# EAGLE board CM FT4232 with RS485 and ESP32 (EAGLE 9.6.2)
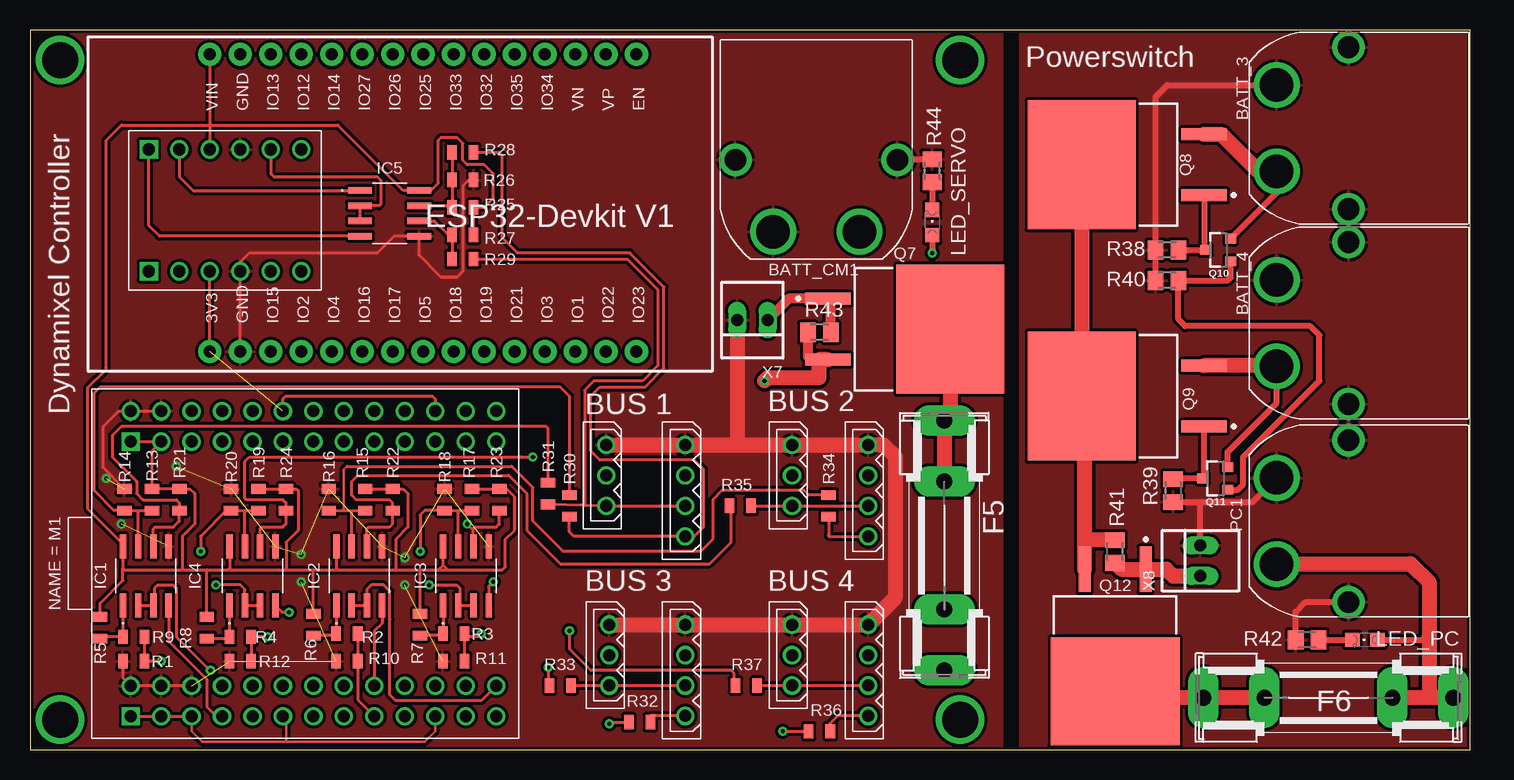
[diagram p0: board, top side]
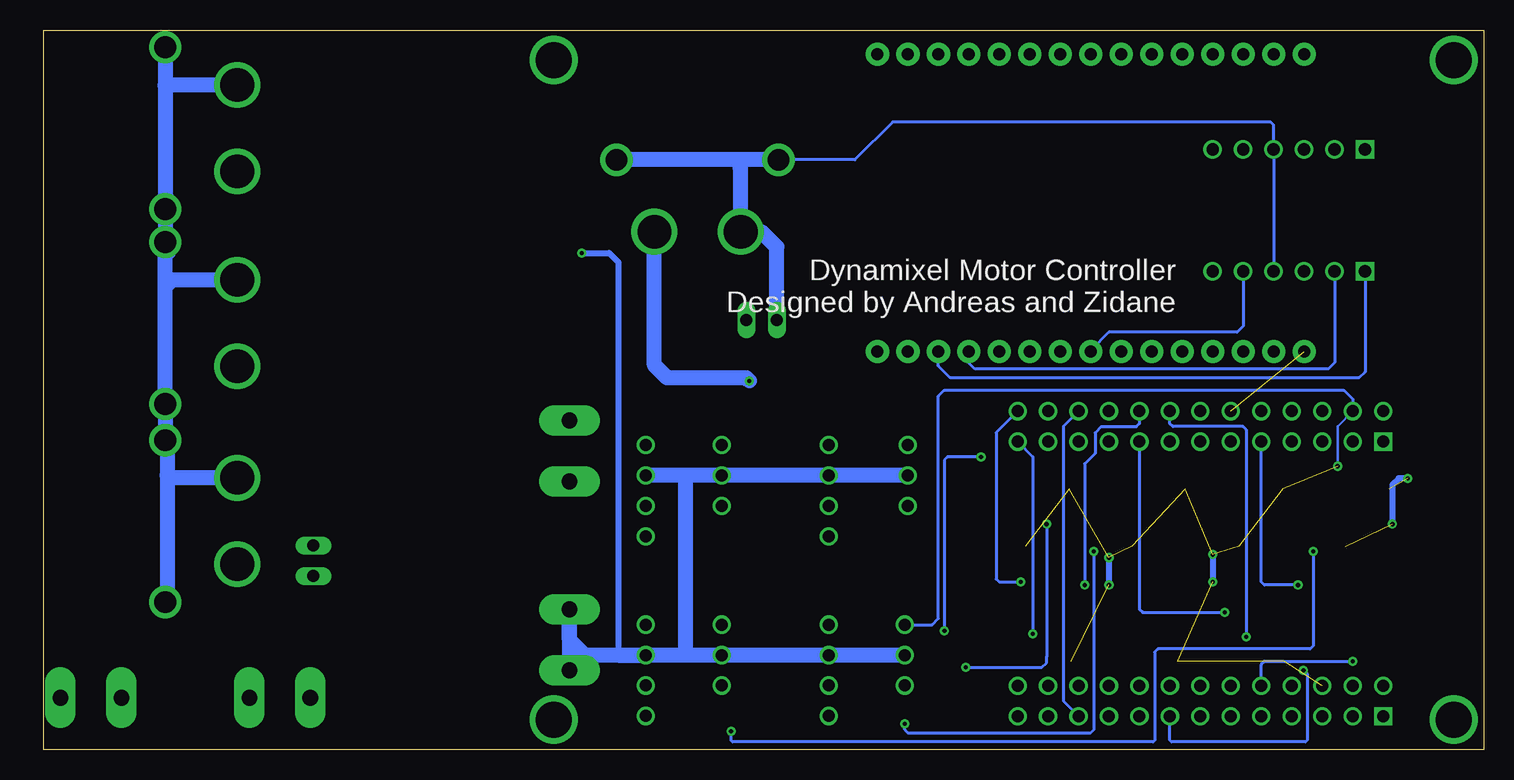
[diagram p1: board, bottom side, seen from below]

Size 120 x 60 mm. Coordinates in mm from the lower left corner, seen from the top.
Outline: 0,0 120,0 120,60 0,60 0,0
Copper layers (1*16): Top 0.035mm / dielectric 1.5mm / Bottom 0.035mm
Design rules "default *": minimum track width 6mil, minimum drill 0.35mm, track to track 10mil, track to pad 10mil, pad to pad 10mil, via to via 10mil, smd to smd 10mil, copper to edge 10mil, drill to drill 6mil, minimum pad ring 10mil, minimum via ring 8mil, stop-mask expansion 4mil, vias tented up to drill 0mil, thermal gap 10mil
Net classes: 4 Battery-Power: width 2.54 mm, drill 1.27 mm, clearance 0.203 mm

## Footprints (pad centres in the part's own frame; a part is rotated, then mirrored left to right if it is on the bottom)
XT60PW-M = drill 1.8: 1 -6.75,-10; 2 6.75,-10 | drill 2.8: + 3.6,-16; - -3.6,-16
SHK20L = drill 1.321 pad 2.54 long: 1A -10.414,0; 1B -5.334,0; 2A 10.414,0; 2B 5.334,0
ADM3078E = smd 1.981 x 0.533: 1 -2.464,1.905; 2 -2.464,0.635; 3 -2.464,-0.635; 4 -2.464,-1.905; 5 2.464,-1.905; 6 2.464,-0.635; 7 2.464,0.635; 8 2.464,1.905
5267-3 = drill 1: 1 0,0; 2 -2.54,0; 3 -5.08,0
5267-4 = drill 1: 1 0,0; 2 -2.54,0; 3 -5.08,0; 4 -7.62,0
CHIPLED_0805 = smd 1.2 x 1.2: A 0,-1.05; C 0,1.05
FT4232H_MINI_MODULE = drill 1 square: CN2-1 -12.715,16.51; CN3-1 10.175,16.51 | drill 1: CN2-2 -10.175,16.51; CN2-3 -12.715,13.97; CN2-4 -10.175,13.97; CN2-5 -12.715,11.43; CN2-6 -10.175,11.43; CN2-7 -12.715,8.89; CN2-8 -10.175,8.89; CN2-9 -12.715,6.35; CN2-10 -10.175,6.35; CN2-11 -12.715,3.81; CN2-12 -10.175,3.81; CN2-13 -12.715,1.27; CN2-14 -10.175,1.27; CN2-15 -12.715,-1.27; CN2-16 -10.175,-1.27; CN2-17 -12.715,-3.81; CN2-18 -10.175,-3.81; CN2-19 -12.715,-6.35; CN2-20 -10.175,-6.35; CN2-21 -12.715,-8.89; CN2-22 -10.175,-8.89; CN2-23 -12.715,-11.43; CN2-24 -10.175,-11.43; CN2-25 -12.715,-13.97; CN2-26 -10.175,-13.97; CN3-2 12.715,16.5; CN3-3 10.175,13.97; CN3-4 12.715,13.97; CN3-5 10.175,11.43; CN3-6 12.715,11.43; CN3-7 10.175,8.89; CN3-8 12.715,8.89; CN3-9 10.175,6.35; CN3-10 12.715,6.35; CN3-11 10.175,3.81; CN3-12 12.715,3.81; CN3-13 10.175,1.27; CN3-14 12.715,1.27; CN3-15 10.175,-1.27; CN3-16 12.715,-1.27; CN3-17 10.175,-3.81; CN3-18 12.715,-3.81; CN3-19 10.175,-6.35; CN3-20 12.715,-6.35; CN3-21 10.175,-8.89; CN3-22 12.715,-8.89; CN3-23 10.175,-11.43; CN3-24 12.715,-11.43; CN3-25 10.175,-13.97; CN3-26 12.715,-13.97
TO-252-3 = smd 3.8 x 1: 1 -6.4,2.54; 3 -6.4,-2.54 | smd 9 x 10.75: 4 3.8,0
SOT23-3 = smd 0.8 x 0.9: 1 -0.95,-1; 2 0.95,-1; 3 0,1.1
0805 = smd 0.8 x 1.2: 1 -0.9,0; 2 0.9,0
M0805 = smd 1.3 x 1.6: 1 -0.95,0; 2 0.95,0
CONV_BOB-12009 = drill 1.016: GND_1 5.08,-1.27; GND_2 -5.08,-1.27; HV 5.08,1.27; HV2 5.08,3.81; HV3 5.08,-3.81; HV4 5.08,-6.35; LV -5.08,1.27; LV2 -5.08,3.81; LV3 -5.08,-3.81; LV4 -5.08,-6.35 | drill 1.016 square: HV1 5.08,6.35; LV1 -5.08,6.35
ESP32-DEVKITV1 = drill 1 pad 1.93: 1 -22.87,-13.54; 2 -20.33,-13.54; 3 -17.79,-13.54; 4 -15.25,-13.54; 5 -12.71,-13.54; 6 -10.17,-13.54; 7 -7.63,-13.54; 8 -5.09,-13.54; 9 -2.55,-13.54; 10 -0.01,-13.54; 11 2.53,-13.54; 12 5.07,-13.54; 13 7.61,-13.54; 14 10.15,-13.54; 15 12.69,-13.54; 16 12.69,11.23; 17 10.15,11.23; 18 7.61,11.23; 19 5.07,11.23; 20 2.53,11.23; 21 -0.01,11.23; 22 -2.55,11.23; 23 -5.09,11.23; 24 -7.63,11.23; 25 -10.17,11.23; 26 -12.71,11.23; 27 -15.25,11.23; 28 -17.79,11.23; 29 -20.33,11.23; 30 -22.87,11.23
22-23-2021 = drill 1 long: 1 -1.27,0; 2 1.27,0

## Placement (x,y rotation side)
BATT_3  XT60PW-M  [XT60PW-M]  119.89,51.82 270 top
BATT_4  XT60PW-M  [XT60PW-M]  119.89,35.56 270 top
BATT_CM1  XT60PW-M  [XT60PW-M]  65.53,59.18 0 top
F5  [SHK20L]  76.2,17.02 270 top
F6  [SHK20L]  108.2,4.32 0 top
IC1  ADM3078E  [ADM3078E]  9.65,14.48 90 top
IC2  ADM3078E  [ADM3078E]  27.43,14.48 90 top
IC3  ADM3078E  [ADM3078E]  36.32,14.48 90 top
IC4  ADM3078E  [ADM3078E]  18.54,14.48 90 top
IC5  ADM3078E  [ADM3078E]  29.97,44.7 0 top
J1  22-03-5035  [5267-3]  48.01,25.4 90 top
J2  22-03-5035  [5267-3]  63.5,25.4 90 top
J3  22-03-5035  [5267-3]  48.26,10.41 90 top
J4  22-03-5035  [5267-3]  63.5,10.41 90 top
J5  22-03-5045  [5267-4]  54.61,25.4 90 top
J6  22-03-5045  [5267-4]  69.85,25.4 90 top
J7  22-03-5045  [5267-4]  54.61,10.41 90 top
J8  22-03-5045  [5267-4]  69.85,10.41 90 top
LED_PC  [CHIPLED_0805]  111.25,9.14 90 top
LED_SERVO  [CHIPLED_0805]  75.18,43.94 0 top
M1  FT4232H_MINI_MODULE  [FT4232H_MINI_MODULE]  24.89,15.49 90 top
PC1  XT60PW-M  [XT60PW-M]  119.89,19.05 270 top
Q7  SQM40P10-40L_GE3  [TO-252-3]  72.9,35.05 0 top
Q8  SQM40P10-40L_GE3  [TO-252-3]  91.44,48.77 180 top
Q9  SQM40P10-40L_GE3  [TO-252-3]  91.44,29.46 180 top
Q10  200mA/40V  [SOT23-3]  99.06,41.66 90 top
Q11  200mA/40V  [SOT23-3]  98.81,22.61 90 top
Q12  SQM40P10-40L_GE3  [TO-252-3]  90.42,8.64 270 top
R1  [0805]  8.64,9.4 180 top
R2  [0805]  26.42,9.65 180 top
R3  [0805]  35.31,9.65 180 top
R4  [0805]  17.53,9.4 180 top
R5  [0805]  5.84,10.16 90 top
R6  [0805]  23.62,10.41 90 top
R7  [0805]  32.51,10.41 90 top
R8  [0805]  14.73,10.16 90 top
R9  [0805]  8.64,7.37 0 top
R10  [0805]  26.42,7.37 0 top
R11  [0805]  35.31,7.37 0 top
R12  [0805]  17.53,7.37 0 top
R13  [0805]  10.16,20.83 90 top
R14  [0805]  7.87,20.83 270 top
R15  [0805]  27.94,20.83 90 top
R16  [0805]  24.89,20.83 270 top
R17  [0805]  36.83,20.83 90 top
R18  [0805]  34.54,20.83 270 top
R19  [0805]  19.05,20.83 90 top
R20  [0805]  16.76,20.83 270 top
R21  [0805]  12.45,20.83 90 top
R22  [0805]  30.23,20.83 90 top
R23  [0805]  39.12,20.83 90 top
R24  [0805]  21.34,20.83 90 top
R25  [0805]  36.07,45.21 0 top
R26  [0805]  36.07,47.5 180 top
R27  [0805]  36.07,42.93 0 top
R28  [0805]  36.07,49.78 0 top
R29  [0805]  36.07,40.89 0 top
R30  [0805]  44.96,20.32 90 top
R31  [0805]  43.18,21.34 90 top
R32  [0805]  50.8,2.29 180 top
R33  [0805]  44.2,5.33 180 top
R34  [0805]  66.55,20.32 90 top
R35  [0805]  59.18,20.32 180 top
R36  [0805]  65.79,1.52 0 top
R37  [0805]  59.69,5.33 0 top
R38  10K  [M0805]  94.74,41.66 0 top
R39  10K  [M0805]  95.25,21.59 90 top
R40  10K  [M0805]  94.74,39.12 0 top
R41  10K  [M0805]  90.42,16.51 270 top
R42  2K  [M0805]  106.43,9.14 0 top
R43  10K  [M0805]  65.79,34.8 0 top
R44  2K  [M0805]  75.18,48.26 270 top
U2  BOB-12009  [CONV_BOB-12009]  16.26,44.96 90 top
U$1  ESP32DEVKITV1  [ESP32-DEVKITV1]  37.85,46.74 0 top
X7  22-23-2021  [22-23-2021]  60.2,35.81 180 top
X8  22-23-2021  [22-23-2021]  97.54,15.75 90 top

## Library data of the parts
BATT_3 BATT_4 BATT_CM1 PC1 = AMASS_XT60
F5 F6 = fuse; OC_FARNELL: unknown; OC_NEWARK: unknown
IC1-IC5 = ADM3078E
J1-J8 = molex
LED_PC LED_SERVO = led
M1 = FT4232H_MINI_MODULE
Q7-Q9 Q12 = Vishay_FET
Q10 Q11 = SparkFun-DiscreteSemi; PROD_ID: TRANS-08052
R1-R37 = SparkFun-Resistors
R38-R44 = rcl; SPICEPREFIX: R
U2 = BOB-12009; AVAILABILITY: In Stock; DESCRIPTION: BSS138 Logic-Level Translator Interface Evaluation Board; MF: SparkFun; MP: BOB-12009; PACKAGE: None; PRICE: None; PURCHASE-URL: https://pricing.snapeda.com/search/part/BOB-12009/?ref=eda
U$1 = ESP32-DEVKITV1
X7 X8 = con-molex; MF: MOLEX; MPN: 22-23-2021; OC_FARNELL: 1462926; OC_NEWARK: 25C3832

## Nets
3V3: M1.CN2-1 M1.CN2-3 M1.CN2-5 M1.CN2-11 M1.CN2-21 M1.CN3-12 M1.CN3-22 U2.LV U$1.1
485_ESP_N: IC5.7 R25.1 R26.2 R28.1
485_ESP_P: IC5.6 R27.1 R29.1
485_N1: IC1.7 R13.1 R14.2 R30.2
485_N2: IC2.7 R15.1 R16.2 R34.2
485_N3: IC3.7 R17.1 R18.2 R32.2
485_N4: IC4.7 R19.1 R20.2 R36.1
485_P1: IC1.6 R21.1 R31.2
485_P2: IC2.6 R22.1 R35.2
485_P3: IC3.6 R23.1 R33.2
485_P4: IC4.6 R24.1 R37.1
+2: BATT_CM1.+ Q7.3 R43.1
+3: Q8.4 Q9.4 Q12.3 R41.1
BLUE_LED: U$1.26
DI1: IC1.4 M1.CN2-7
DIR_3V3: U2.LV3 U$1.8
DIR_5V: IC5.2 IC5.3 U2.HV3
DRAIN2: F5.1A F5.1B Q7.4
DRAIN3: F6.1A F6.1B Q12.4
DXL_ENABLE: U$1.21
DXL_N1: J5.4 R28.2 R30.1
DXL_N2: J6.4 R34.1
DXL_N3: J7.4 R32.1
DXL_N4: J8.4 R36.2
DXL_P1: J1.3 J5.3 R29.2 R31.1
DXL_P2: J2.3 J6.3 R35.1
DXL_P3: J3.3 J7.3 R33.1
DXL_P4: J4.3 J8.3 R37.2
GND: BATT_CM1.1 BATT_CM1.2 BATT_CM1.- IC1.5 IC2.5 IC3.5 IC4.5 IC5.5 J1.1 J2.1 J3.1 J4.1 J5.1 J6.1 J7.1 J8.1 M1.CN2-2 M1.CN2-4 M1.CN2-6 M1.CN3-2 M1.CN3-4 R9.1 R10.1 R11.1 R12.1 R14.1 R16.1 R18.1 R20.1 R26.1 R44.1 U2.GND_1 U2.GND_2 U$1.2 X7.2
GND_PC: BATT_3.1 BATT_3.2 BATT_3.- BATT_4.1 BATT_4.2 BATT_4.- PC1.1 PC1.2 PC1.- R38.1 R39.1 R40.1 R42.1 X8.2
GREE_LED: U$1.28
N$2: IC2.2 IC2.3 M1.CN2-26
N$3: IC3.2 IC3.3 M1.CN3-18
N$4: IC4.2 IC4.3 M1.CN3-9
N$5: M1.CN2-10 R1.1 R9.2
N$7: M1.CN2-17 R2.1 R10.2
N$8: IC2.1 R2.2 R6.1
N$9: IC3.1 R3.2 R7.1
N$10: M1.CN3-25 R3.1 R11.2
N$11: M1.CN3-16 R4.1 R12.2
N$12: IC4.1 R4.2 R8.1
N$14: IC2.4 M1.CN2-18
N$15: IC3.4 M1.CN3-26
N$16: IC4.4 M1.CN3-17
N$17: BATT_3.+ Q8.3 Q10.2
N$18: BATT_4.+ Q9.3 Q11.2
N$19: Q8.1 Q10.3 R38.2
N$20: Q9.1 Q11.3 R39.2
N$22: Q10.1 Q11.1 R40.2
N$23: Q12.1 R41.2 X8.1
N$24: Q7.1 R43.2 X7.1
N$25: LED_PC.C R42.2
N$26: LED_SERVO.C R44.2
RE1: IC1.2 IC1.3 M1.CN2-15
RED_LED: U$1.27
RO1: IC1.1 R1.2 R5.1
RX_3V3: U2.LV2 U$1.12
RX_5V: IC5.1 U2.HV2
SCL: U$1.14
SDA: U$1.11
SW_START: U$1.19
SW_STOP: U$1.20
TX_3V3: U2.LV1 U$1.13
TX_5V: IC5.4 U2.HV1
VCC: IC1.8 IC2.8 IC3.8 IC4.8 IC5.8 M1.CN3-1 M1.CN3-3 R5.2 R6.2 R7.2 R8.2 R13.2 R15.2 R17.2 R19.2 R21.2 R22.2 R23.2 R24.2 R25.2 R27.2 U2.HV U$1.30
VCC_PC: F6.2A F6.2B LED_PC.A PC1.+
VDD: F5.2A F5.2B J1.2 J2.2 J3.2 J4.2 J5.2 J6.2 J7.2 J8.2 LED_SERVO.A

## Tracks (layer width: path | path; a pad name or v marks a point on that pad's centre or on a via)
3V3  (1 unrouted)
  Top 0.203: M1.CN2-5 13.46,1.52 14.35,0.64 21.34,0.64 | 21.34,0.64 32.89,0.64 33.78,1.52 M1.CN2-21 | M1.CN2-11 21.34,2.52 21.34,0.64
  Top 0.254: M1.CN2-1 M1.CN2-3 M1.CN2-5 | M1.CN3-12 21.08,29.21 21.34,29.46 33.53,29.46 33.78,29.21 M1.CN3-22 | U$1.1 14.98,39.87 U2.LV
  Bottom 0.254: M1.CN3-22 35.05,26.94 35.05,4.05 M1.CN2-21
485_ESP_N
  Top 0.254: 35.17,45.34 R25.1 | IC5.7 35.17,45.34 | R28.1 R26.2 35.17,45.34
485_ESP_P
  Top 0.254: IC5.6 33.71,44.07 34.85,42.93 R27.1 R29.1
485_N1
  Top 0.254: 8.89,19.93 R14.2 7,19.93 5.33,21.59 5.33,29.72 5.84,30.23 44.2,30.23 44.96,29.46 R30.2 | 8.89,19.93 R13.1 | IC1.7 9.02,19.8 8.89,19.93
485_N2
  Top 0.203: 26.16,19.93 26.16,23.37 26.42,23.62
  Top 0.254: R16.2 26.16,19.93 26.92,19.93 | 26.92,19.93 R15.1 | IC2.7 26.8,19.8 26.92,19.93 | 26.42,23.62 40.13,23.62 41.91,21.84 41.91,19.05 44.45,16.51 55.88,16.51 56.9,17.53 56.9,20.83 57.66,21.59 64.52,21.59 64.89,21.22 R34.2
485_N3  (via drill 0.35)
  Top 0.254: 35.81,19.93 R18.2 32.88,19.93 32.51,19.56 v32.51,16.51 | 35.81,19.93 R17.1 | IC3.7 35.69,19.8 35.81,19.93 | v48.26,2.16 48.38,2.16 48.51,2.29 R32.2
  Bottom 0.254: v48.26,2.16 48.26,1.65 48.01,1.39 32.77,1.39 32.51,1.65 v32.51,16.51
485_N4  (via drill 0.35)
  Top 0.254: 18.03,19.93 R20.2 16.37,19.93 14.22,17.78 v14.22,16.51 | 18.03,19.93 R19.1 | IC4.7 17.91,19.8 18.03,19.93 | v62.74,1.52 R36.1
  Bottom 0.254: v14.22,16.51 14.22,8.64 14.48,8.38 27.18,8.38 27.43,8.13 27.43,0.76 27.56,0.64 62.61,0.64 62.74,0.76 v62.74,1.52
485_P1
  Top 0.254: IC1.6 10.29,18.41 10.41,18.54 11.94,18.54 12.45,19.05 R21.1 12.45,20.57 12.19,20.83 9.4,20.83 8.89,21.34 8.89,22.35 6.86,24.38 6.86,26.19 7.59,26.92 43.02,26.92 43.18,26.77 R31.2
485_P2
  Top 0.254: IC2.6 28.07,18.41 28.19,18.54 29.97,18.54 30.23,18.8 R22.1 30.23,20.57 29.97,20.83 27.18,20.83 26.8,21.21 26.8,22.35 27.3,22.86 39.88,22.86 41.4,21.34 41.4,18.29 44.2,15.49 56.64,15.49 58.42,17.27 58.42,20.18 R35.2
485_P3  (via drill 0.35)
  Top 0.254: IC3.6 36.96,18.41 | 36.96,18.41 37.08,18.54 38.86,18.54 39.12,18.8 R23.1 | 36.96,18.41 36.83,18.41 v36.45,18.8 | v43.18,6.86 43.18,5.45 R33.2
  Bottom 0.254: v36.45,18.8 36.45,7.75 36.45,7.24 36.83,6.86 v43.18,6.86
485_P4  (via drill 0.35)
  Top 0.254: IC4.6 19.18,18.41 19.3,18.54 21.08,18.54 21.34,18.8 R24.1 21.34,20.57 21.08,20.83 18.03,20.83 17.91,20.95 17.91,24 18.29,24.38 v41.91,24.38 | R37.1 58.67,5.45 58.67,6.35 58.42,6.6 46.74,6.6 44.96,8.38 v44.96,9.91
  Bottom 0.254: v41.91,24.38 44.7,24.38 44.96,24.13 v44.96,9.91
+2  (via drill 0.35)
  Top 0.813: R43.1 64.84,32.77 65.09,32.51 Q7.3
  Top 1.27: Q7.3 65.74,32.51 65.74,30.99 61.47,30.99 v61.21,30.73
  Bottom 1.27: v61.21,30.73 61.47,30.99 68.07,30.99 69.13,32.05 BATT_CM1.+
+3
  Top 1.27: Q8.4 87.64,30.73 | 87.64,30.73 Q9.4 | Q12.3 87.88,17.78 | 87.88,17.78 87.88,30.48 89.15,31.75 88.66,31.75 87.64,30.73 | R41.1 88.2,17.46 87.88,17.78
DI1
  Top 0.254: IC1.4 11.56,9.02 14.73,5.84 14.73,3.56 15.51,2.78 M1.CN2-7
DIR_3V3
  Bottom 0.254: U2.LV3 20.07,35.31 20.57,34.8 31.24,34.8 32.76,33.28 U$1.8
DIR_5V
  Top 0.254: U2.HV3 20.07,48.01 20.32,47.75 28.96,47.75 29.21,47.5 29.21,45.47 29.08,45.34 IC5.2 IC5.3
DRAIN2
  Top 1.27: Q7.4 76.7,27.93 F5.1A F5.1B
DRAIN3
  Top 1.27: F6.1B F6.1A 89.66,4.32 89.15,4.83 89.28,4.95 90.31,4.95 Q12.4
DXL_N1
  Top 0.254: R30.1 44.96,18.15 45.33,17.78 J5.4 55.37,17.78 56.13,18.54 56.13,23.37 55.37,24.13 47.5,24.13 46.74,24.89 46.74,29.46 47.5,30.23 51.26,30.23 52.83,31.79 52.83,38.56 49.99,41.4 40.64,41.4 39.37,42.67 39.37,49.53 39.12,49.78 R28.2
DXL_N2
  Top 0.254: R34.1 66.55,17.9 66.56,17.78 J6.4
DXL_N3
  Top 0.254: J7.4 51.7,2.79 R32.1
DXL_N4
  Top 0.254: J8.4 67.31,2.79 66.69,2.17 R36.2
DXL_P1
  Top 0.254: 46.23,20.35 47.5,20.32 J1.3 J5.3 | 46.23,20.35 R31.1 | R29.2 49.78,40.89 52.32,38.35 52.32,32 51.05,30.73 46.99,30.73 46.23,29.97 46.23,20.35
DXL_P2
  Top 0.254: R35.1 J2.3 J6.3
DXL_P3
  Top 0.254: R33.1 J3.3 J7.3
DXL_P4
  Top 0.254: R37.2 J4.3 J8.3
GND  (via drill 0.35)  (14 unrouted)
  Top 0.254: M1.CN2-6 M1.CN2-4 M1.CN2-2 7.74,5.96 R9.1 | M1.CN3-4 M1.CN3-2 7.38,28.21 6.1,26.92 6.1,23.51 R14.1 | U$1.2 17.52,39.87 | 17.52,39.87 U2.GND_2 | 17.52,39.87 17.52,40.63 18.29,41.4 28.96,41.4 30.35,42.8 IC5.5 32.44,41.22 34.29,39.37 35.56,39.37 36.07,39.88 36.07,46.99 36.58,47.5 R26.1
  Top 0.508: R44.1 75.16,49.18 BATT_CM1.2
  Top 1.27: J1.1 J5.1 58.67,25.4 | 58.67,25.4 J2.1 J6.1 71.12,25.4 72.14,24.38 72.14,12.7 J8.1 J4.1 J7.1 J3.1 | X7.2 58.93,25.65 58.67,25.4
  Bottom 0.203: M1.CN3-4 12.19,26.94 v12.19,23.62
  Bottom 0.254: U2.GND_2 U2.GND_1 17.53,52.07 17.78,52.32 49.28,52.32 52.42,49.18 BATT_CM1.1 | J3.1 45.97,10.41 45.47,10.92 45.47,29.46 44.96,29.97 11.68,29.97 10.92,29.21 M1.CN3-4
  Bottom 0.508: v22.61,16.26 v22.61,13.97 | v31.24,16 v31.24,13.72 | v6.35,22.61 7.11,22.61 7.62,22.1 v7.62,18.8
  Bottom 1.27: BATT_CM1.1 61.98,49.18 | 61.98,49.18 BATT_CM1.2 | 61.98,49.18 61.98,48.51 61.93,48.47 BATT_CM1.- 60.2,43.18 58.93,41.91 X7.2
  pour Top: 0,59.94 81.03,59.94 81.03,0.25 0,0.25
GND_PC
  Top 0.508: R39.1 97.54,20.64 | 97.54,20.64 101.88,20.64 PC1.- | X8.2 97.54,20.64 | R42.1 105.48,11.5 106.28,12.3 PC1.2 | R40.1 R38.1 93.79,54.42 94.79,55.42 BATT_3.-
  Bottom 1.27: 109.89,42.93 BATT_3.2 109.73,45.23 109.73,45.97 109.89,46.13 109.89,55.37 | 109.89,42.93 BATT_4.1 | 109.73,22.86 109.73,25.15 109.89,25.31 BATT_4.2 109.89,38.61 | 109.73,22.86 109.73,12.46 PC1.2 | 109.89,38.61 109.89,41.24 109.47,41.66 109.47,42.51 109.89,42.93 | BATT_3.1 109.89,55.37 | BATT_3.- 109.84,55.42 109.89,55.37 | BATT_4.- 109.34,39.16 109.89,38.61 | PC1.- 109.52,22.65 109.73,22.86
  pour Top: 82.55,59.94 119.89,59.94 119.89,0 82.55,0
N$1  (via drill 3)
  other vias: 2.5,2.5
N$2
  Top 0.254: IC2.2 IC2.3 28.07,13.34 28.45,13.72 29.46,13.72 29.98,13.2 29.98,10.87 29.97,10.85 29.97,4.57 30.48,4.06 37.61,4.06 M1.CN2-26
N$3  (via drill 0.35)
  Top 0.254: IC3.2 35.81,12.01 | 35.81,12.01 IC3.3 | v33.27,13.72 35.56,13.72 35.81,13.46 35.81,12.01
  Bottom 0.254: M1.CN3-18 28.7,27.18 28.96,26.92 31.89,26.92 32.39,26.42 32.39,24.69 33.27,23.81 v33.27,13.72
N$4  (via drill 0.35)
  Top 0.254: IC4.3 IC4.2 17.91,13.34 17.53,13.72 v15.49,13.72
  Bottom 0.254: v15.49,13.72 18.29,13.72 18.54,13.97 M1.CN3-9
N$5  (via drill 0.35)
  Top 0.254: R1.1 R9.2 v10.92,7.37
  Bottom 0.254: M1.CN2-10 18.54,7.1 18.27,7.37 v10.92,7.37
N$6  (via drill 3)
  other vias: 2.5,57.5
N$7
  Top 0.254: R2.1 R10.2 27.32,4.17 M1.CN2-17
N$8
  Top 0.254: IC2.1 25.53,9.66 R2.2 25.38,9.51 R6.1
N$9
  Top 0.254: IC3.1 34.42,9.66 R3.2 34.27,9.51 R7.1
N$10  (via drill 0.35)
  Top 0.254: R3.1 36.21,9.4 | 36.21,9.4 R11.2 | v37.59,9.65 37.34,9.4 36.21,9.4
  Bottom 0.254: M1.CN3-25 37.59,24.4 v37.59,9.65
N$11  (via drill 0.35)
  Top 0.254: R12.2 R4.1 v19.81,9.4
  Bottom 0.254: v19.81,9.4 19.81,26.67 20.07,26.92 25.91,26.92 26.16,27.18 M1.CN3-16
N$12
  Top 0.254: R8.1 16.49,9.26 R4.2 16.63,12 IC4.1
N$13  (via drill 3)
  other vias: 77.5,2.5
N$14
  Top 0.254: IC2.4 29.34,10.54 28.7,9.91 M1.CN2-18
N$15  (via drill 0.35)
  Top 0.254: v38.61,13.97 38.23,13.59 IC3.4
  Bottom 0.254: M1.CN3-26 40.64,26.43 40.64,14.22 40.39,13.97 v38.61,13.97
N$16  (via drill 0.35)
  Top 0.254: v21.59,11.43 21.03,11.43 IC4.4
  Bottom 0.254: M1.CN3-17 28.7,11.68 28.45,11.43 v21.59,11.43
N$17
  Top 0.508: Q10.2 103.89,46.43 BATT_3.+
  Top 1.27: Q8.3 99.27,51.31 102.36,48.22 BATT_3.+
N$18
  Top 0.508: Q11.2 99.81,24.83 103.89,28.91 BATT_4.+ 103.84,32
  Top 1.27: BATT_4.+ 103.84,32 Q9.3
N$19
  Top 0.508: Q8.1 97.84,41.78 Q10.3 R38.2
N$20
  Top 0.508: R39.2 95.32,22.61 Q11.3 97.84,22.74 Q9.1
N$21  (via drill 3)
  other vias: 77.5,57.5
N$22
  Top 0.508: Q10.1 100.08,40.69 100.08,39.37 99.82,39.12 R40.2 95.69,35.88 96.27,35.31 106.68,35.31 107.44,34.54 107.44,30.73 101.09,24.38 101.09,22.1 100.65,21.66 Q11.1
N$23
  Top 1.27: R41.2 90.95,15.04 Q12.1 94.69,15.04 95.25,14.48 X8.1
N$24
  Top 0.813: X7.1 63.25,37.59 Q7.1 66.74,37.35 R43.2
N$25
  Top 0.508: R42.2 LED_PC.C
N$26
  Top 0.508: R44.2 LED_SERVO.C
RE1  (via drill 0.35)
  Top 0.254: IC1.2 IC1.3 10.41,12.14 10.41,13.46 10.67,13.72 11.94,13.72 12.21,13.45 12.21,10.87 12.19,10.85 12.19,9.4 14.98,6.61 v15.04,6.61
  Bottom 0.254: v15.04,6.61 14.73,6.3 14.73,0.76 14.86,0.64 26.04,0.64 26.16,0.76 M1.CN2-15
RO1
  Top 0.254: IC1.1 R1.2 5.85,9.4 R5.1
RX_3V3
  Bottom 0.254: U2.LV2 12.45,32.26 12.95,31.75 42.42,31.75 42.92,32.25 U$1.12
RX_5V
  Top 0.254: U2.HV2 12.45,47.75 13.59,46.61 IC5.1
TX_3V3
  Bottom 0.254: U2.LV1 9.91,31.5 10.41,30.99 44.45,30.99 45.46,31.99 U$1.13
TX_5V
  Top 0.254: IC5.4 10.79,42.8 9.91,43.69 U2.HV1
VCC
  Top 0.254: R15.2 R22.2 31.1,21.73 31.5,21.34 31.5,18.54 30.48,17.53 30.48,14.99 | R19.2 R24.2 22.21,21.73 22.35,21.59 22.35,18.29 21.34,17.27 21.34,14.99 | R17.2 R23.2 39.74,21.73 40.39,21.08 40.39,18.29 39.62,17.53 39.62,15.24 39.37,14.99 34.8,14.99 | 7.75,15.11 IC1.8 7.75,17.14 4.83,20.07 4.83,30.18 6.35,31.71 6.35,50.8 7.62,52.07 14.98,52.07 | 12.7,14.99 7.87,14.99 7.75,15.11 | 12.7,14.99 14.73,14.99 | 14.73,14.99 16.51,14.99 | 16.51,14.99 21.34,14.99 | 21.34,14.99 23.62,14.99 | 23.62,14.99 25.65,14.99 | 25.65,14.99 30.48,14.99 | 30.48,14.99 32.51,14.99 | 32.51,14.99 34.04,14.99 | 34.42,15.37 34.04,14.99 | 34.42,15.37 IC3.8 | 34.42,15.37 34.8,14.99 | 12.7,14.99 12.7,17.78 13.72,18.8 13.72,21.34 13.32,21.73 R21.2 R13.2 10.16,24.91 M1.CN3-3 M1.CN3-1 | IC4.8 16.64,15.11 16.51,14.99 | IC2.8 25.53,15.11 25.65,14.99 | R5.2 5.84,12.19 7.75,14.1 7.75,15.11 | R6.2 23.62,14.99 | R8.2 14.73,14.99 | R7.2 32.51,14.99 | 34.04,14.99 34.8,14.99 | U$1.30 14.98,52.07 | 14.98,52.07 14.98,50.05 U2.HV | R27.2 R25.2 37.85,45.21 38.61,45.97 38.61,48.01 37.85,48.77 36.45,48.77 36.07,49.15 36.07,50.55 35.56,51.05 34.29,51.05 34.04,50.8 34.04,47.24 33.4,46.61 IC5.8 31.11,46.61 25.65,52.07 14.98,52.07
VCC_PC
  Top 0.508: LED_PC.A 116.33,9.14 116.59,9.4
  Top 1.27: F6.2A 116.59,4.32 | 116.59,4.32 114.3,4.32 113.79,4.83 113.03,4.06 113.28,4.06 F6.2B | PC1.+ 103.93,15.49 115.06,15.49 116.59,13.97 116.59,9.4 116.59,4.32
VDD  (via drill 0.35)
  Top 0.508: LED_SERVO.A v75.18,41.4
  Bottom 0.508: v75.18,41.4 72.9,41.4 72.14,40.64 72.14,7.87
  Bottom 1.27: J3.2 J7.2 J4.2 66.55,7.87 | 66.55,7.87 J8.2 | J1.2 J5.2 J2.2 66.55,22.86 | 66.55,22.86 J6.2 | F5.2A F5.2B 76.2,9.14 74.93,7.87 J8.2 | 66.55,22.86 66.55,7.87 | 72.14,7.87 J8.2

## Text on the board
tPlace: BUS 1 | BUS 2 | BUS 3 | BUS 4
tNames: Powerswitch | Dynamixel Controller
bNames: Dynamixel Motor Controller / Designed by Andreas and Zidane